# Altium PCB PCB1.PcbDoc
Units mm, origin at the board's own origin, x right, y up, seen from the top; angles counter-clockwise.
Board outline 95 x 70 mm, 2 copper layers (Top Layer, Bottom Layer); 25 components, 21 nets, 87 pads, 0 vias.
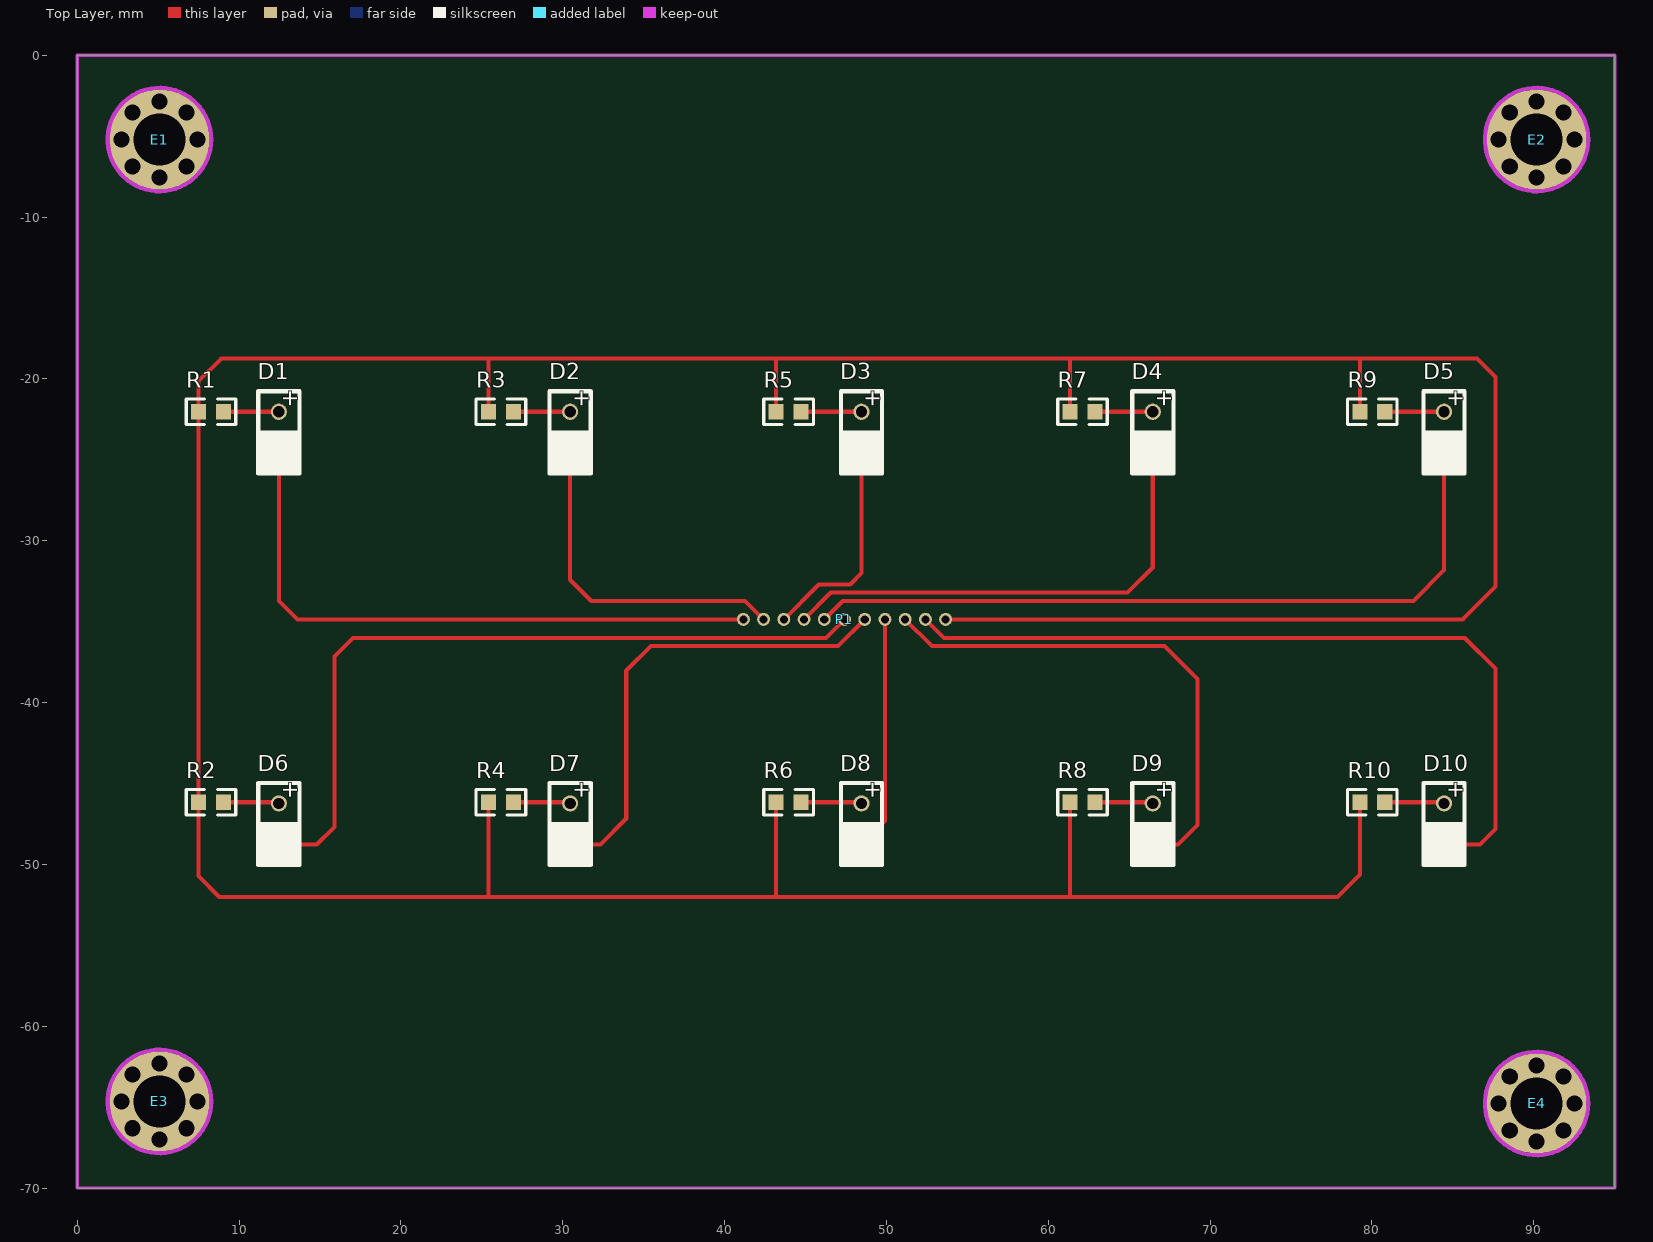
[diagram p0: Top Layer view]
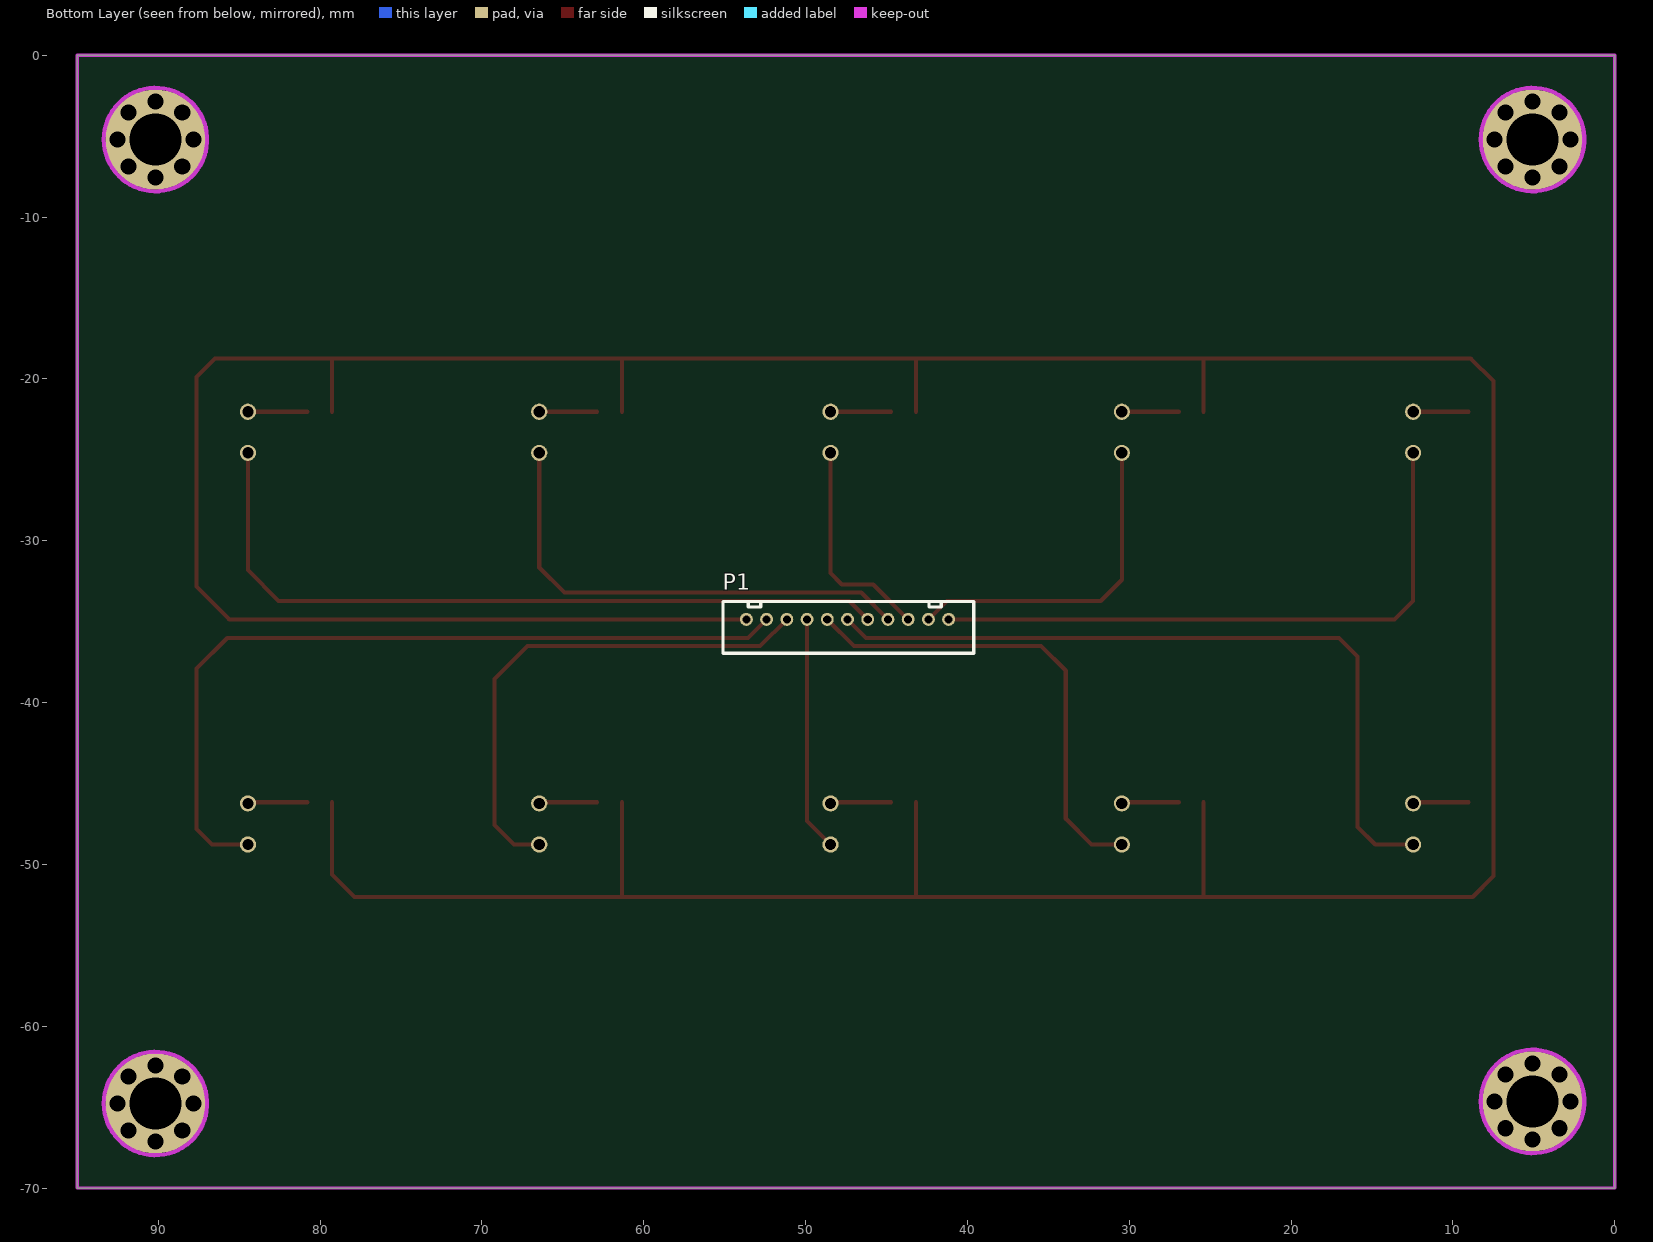
[diagram p1: Bottom Layer view, seen from below]

## Layer stack, top to bottom
Top Solder: solder mask 0.0102, Solder Resist, Dk 3.5
Top Layer: signal copper 0.0356
Dielectric 1: dielectric 0.32, FR-4, Dk 4.8
Bottom Layer: signal copper 0.0356
Bottom Solder: solder mask 0.0102, Solder Resist, Dk 3.5

## Board outline
0,-70 0,0 95,0 95,-70

## Design rules (kind name [scope] priority, off if disabled: settings)
Clearance [All] p1: gap=0.254
HoleSize [All] p1: absolutevalues=TRUE maxlimit=5 minlimit=0.025 maxpercent=80.000 minpercent=20.000
PolygonConnect [All] p1: connectstyle=Relief reliefconductorwidth=0.254 reliefentries=4 polygonreliefangle="90 Angle" airgapwidth=0.254
RoutingVias [All] p1: holewidth=0.711 width=1.27 viastyle="Through Hole" minholewidth=0.711 minwidth=1.27 maxholewidth=0.711 maxwidth=1.27
SolderMaskExpansion [All] p1: expansion=0.102
Width [All] p1: maxlimit=0.254 minlimit=0.254 preferedwidth=0.254
29 further rules are at their usual default settings.

## Components (designator, comment, footprint, x,y, rotation, side; value= is the part's Value field where it differs from the comment)
D1 "LED2" LED1 12.455,-24.568 r90 top
D2 "LED2" LED1 30.455,-24.568 r90 top
D3 "LED2" LED1 48.455,-24.568 r90 top
D4 "LED2" LED1 66.455,-24.568 r90 top
D5 "LED2" LED1 84.455,-24.568 r90 top
D6 "LED2" LED1 12.455,-48.768 r90 top
D7 "LED2" LED1 30.455,-48.768 r90 top
D8 "LED2" LED1 48.455,-48.768 r90 top
D9 "LED2" LED1 66.455,-48.768 r90 top
D10 "LED2" LED1 84.455,-48.768 r90 top
E1 "Antenna" "定位孔 Φ3.2" 5.08,-5.207 r0 top
E2 "Antenna" "定位孔 Φ3.2" 90.17,-5.207 r0 top
E3 "Antenna" "定位孔 Φ3.2" 5.08,-64.643 r0 top
E4 "Antenna" "定位孔 Φ3.2" 90.17,-64.77 r0 top
P1 "Header 11" XH11 41.157,-34.855 r180 top
R1 "102" 0603_R 8.264,-22.028 r180 top
R2 "102" 0603_R 8.264,-46.158 r180 top
R3 "102" 0603_R 26.171,-22.028 r180 top
R4 "102" 0603_R 26.171,-46.158 r180 top
R5 "102" 0603_R 43.951,-22.028 r180 top
R6 "102" 0603_R 43.951,-46.158 r180 top
R7 "102" 0603_R 62.112,-22.028 r180 top
R8 "102" 0603_R 62.112,-46.158 r180 top
R9 "102" 0603_R 80.019,-22.028 r180 top
R10 "102" 0603_R 80.019,-46.158 r180 top

## Footprints (in the part's own frame and the unit in brackets; to place one, negate y for a bottom-side part, rotate by r counter-clockwise, add the part's x,y. Pads: shape width x height; smd on the part's side, far side on the other; paste and mask are expansions set on the pad)
0603_R [mm]
  rect 0.93x0.98 smd: 1(-0.77,0) 2(0.77,0)
  silkscreen extent -1.53,-0.79 1.54,0.79, body extent -0.85,-0.4 0.85,0.4, height 0.56
LED1 [mm]
  round 1 hole 0.7: 1(2.54,0) 2(0,0)
  silkscreen extent -1.27,-1.27 3.81,1.27
XH11 [mm] "Connector; Header; 5 Position"
  round 0.8 hole 0.5: 1(0,0) 2(-1.25,0) 3(-2.5,0) 4(-3.75,0) 5(-5,0) 6(-6.25,0) 7(-7.5,0) 8(-8.75,0) 9(-10,0) 10(-11.25,0) 11(-12.5,0)
"定位孔 Φ3.2" [mm]
  round 1 hole 1 unplated: 1(-2.35,0) 1(-1.662,-1.662) 1(-1.662,1.662) 1(0,-2.35) 1(0,2.35) 1(1.662,-1.662) 1(1.662,1.662) 1(2.35,0)
  round 6.2 hole 3.2: 1(0,0)
  Keep-Out Layer circle w0.254: c0,0 r3.2

## Part data
D1 D2 D3 D4 D5 D6 D7 D8 D9 D10: "Typical RED, GREEN, YELLOW, AMBER GaAs LED"
E1 E2 E3 E4: "Generic Antenna"
P1: "Header, 11-Pin"
R1 R2 R3 R4 R5 R6 R7 R8 R9 R10: library part R_2

## Nets (pads, with @x,y where several pads share a name; then routed paths per layer and width w, separated by ;. In a path a pad name is that pad's centre, name@x,y a point inside that pad or via, vN(x,y) a via of type N, cw(c..) or ccw(c..) an arc to the next point about the centre after c; other vN are vias at no path point)
LED1: D1.2 P1.1 | length 38.3
  Top Layer w0.254: D1.2 12.455,-33.712 13.598,-34.855 P1.1
LED2: D2.2 P1.2 | length 20.8
  Top Layer w0.254: D2.2 30.455,-32.408 31.759,-33.712 41.264,-33.712 P1.2
LED3: D3.2 P1.3 | length 13.4
  Top Layer w0.254: P1.3 45.816,-32.696 47.761,-32.696 48.455,-32.002 D3.2
LED4: D4.2 P1.4 | length 30
  Top Layer w0.254: P1.4 46.558,-33.204 64.906,-33.204 66.455,-31.655 D4.2
LED5: D5.2 P1.5 | length 46.8
  Top Layer w0.254: P1.5 47.3,-33.712 82.559,-33.712 84.455,-31.816 D5.2
LED6: D6.2 P1.6 | length 46.9
  Top Layer w0.254: D6.2 14.798,-48.768 15.884,-47.682 15.884,-37.141 17.027,-35.998 46.264,-35.998 P1.6
LED7: D7.2 P1.7 | length 29.3
  Top Layer w0.254: D7.2 32.324,-48.768 33.918,-47.174 33.918,-38.03 35.442,-36.506 47.006,-36.506 P1.7
LED8: D8.2 P1.8 | length 14.5
  Top Layer w0.254: D8.2 49.907,-47.316 P1.8
LED9: D9.2 P1.9 | length 31.9
  Top Layer w0.254: P1.9 52.808,-36.506 67.192,-36.506 69.224,-38.538 69.224,-47.555 68.011,-48.768 D9.2
LED10: D10.2 P1.10 | length 50
  Top Layer w0.254: P1.10 53.55,-35.998 85.734,-35.998 87.639,-37.903 87.639,-47.809 86.68,-48.768 D10.2
NetD1_1: D1.1 R1.1 | length 3.4
  Top Layer w0.254: R1.1 D1.1
NetD2_1: D2.1 R3.1 | length 3.5
  Top Layer w0.254: R3.1 D2.1
NetD3_1: D3.1 R5.1 | length 3.7
  Top Layer w0.254: R5.1 D3.1
NetD4_1: D4.1 R7.1 | length 3.6
  Top Layer w0.254: R7.1 D4.1
NetD5_1: D5.1 R9.1 | length 3.7
  Top Layer w0.254: R9.1 D5.1
NetD6_1: D6.1 R2.1 | length 3.4
  Top Layer w0.254: R2.1 12.385,-46.158 D6.1
NetD7_1: D7.1 R4.1 | length 3.5
  Top Layer w0.254: R4.1 30.385,-46.158 D7.1
NetD8_1: D8.1 R6.1 | length 3.8
  Top Layer w0.254: R6.1 48.385,-46.158 D8.1
NetD9_1: D9.1 R8.1 | length 3.6
  Top Layer w0.254: R8.1 66.385,-46.158 D9.1
NetD10_1: D10.1 R10.1 | length 3.7
  Top Layer w0.254: R10.1 84.385,-46.158 D10.1
VCC3.3: P1.11 R1.2 R2.2 R3.2 R4.2 R5.2 R6.2 R7.2 R8.2 R9.2 R10.2 | length 267.3
  Top Layer w0.254: 25.401,-51.992 R4.2 ; R3.2 25.401,-18.734 ; 43.181,-51.865 R6.2 ; R5.2 43.181,-18.861 ; P1.11 85.607,-34.855 87.639,-32.823 87.639,-19.869 86.496,-18.726 8.899,-18.726 7.494,-20.131 R1.2 R2.2 7.494,-50.722 8.772,-52 77.86,-52 79.249,-50.611 R10.2 ; 61.342,-51.992 R8.2 ; R7.2 61.342,-18.734 ; R9.2 79.249,-18.734
pads on no net: E1.1 E2.1 E3.1 E4.1

## Keep-outs
Keep-Out Layer:
  the board outline again, w0.2

## Text inside footprints (layer, text, board x,y; h text height)
D1: Top Overlay "+" at 13.598,-21.774 h1 r90
D2: Top Overlay "+" at 31.598,-21.774 h1 r90
D3: Top Overlay "+" at 49.598,-21.774 h1 r90
D4: Top Overlay "+" at 67.598,-21.774 h1 r90
D5: Top Overlay "+" at 85.598,-21.774 h1 r90
D6: Top Overlay "+" at 13.598,-45.974 h1 r90
D7: Top Overlay "+" at 31.598,-45.974 h1 r90
D8: Top Overlay "+" at 49.598,-45.974 h1 r90
D9: Top Overlay "+" at 67.598,-45.974 h1 r90
D10: Top Overlay "+" at 85.598,-45.974 h1 r90